# EAGLE board RangkaianESP32_&_RangkaianDriverMotorDC (EAGLE 9.6.2)
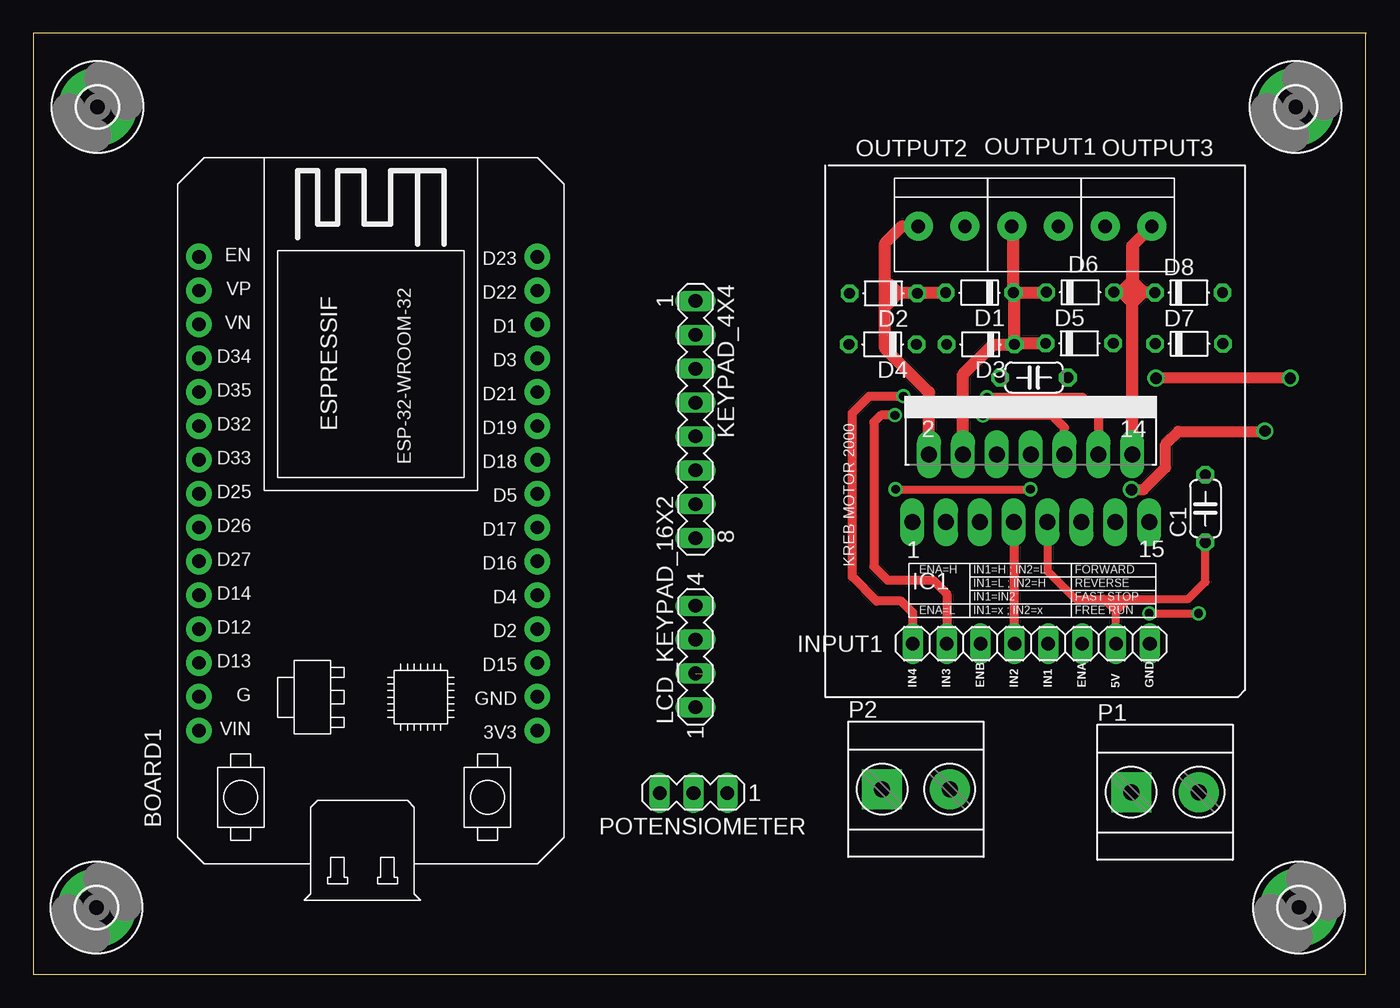
[diagram p0: board, top side]
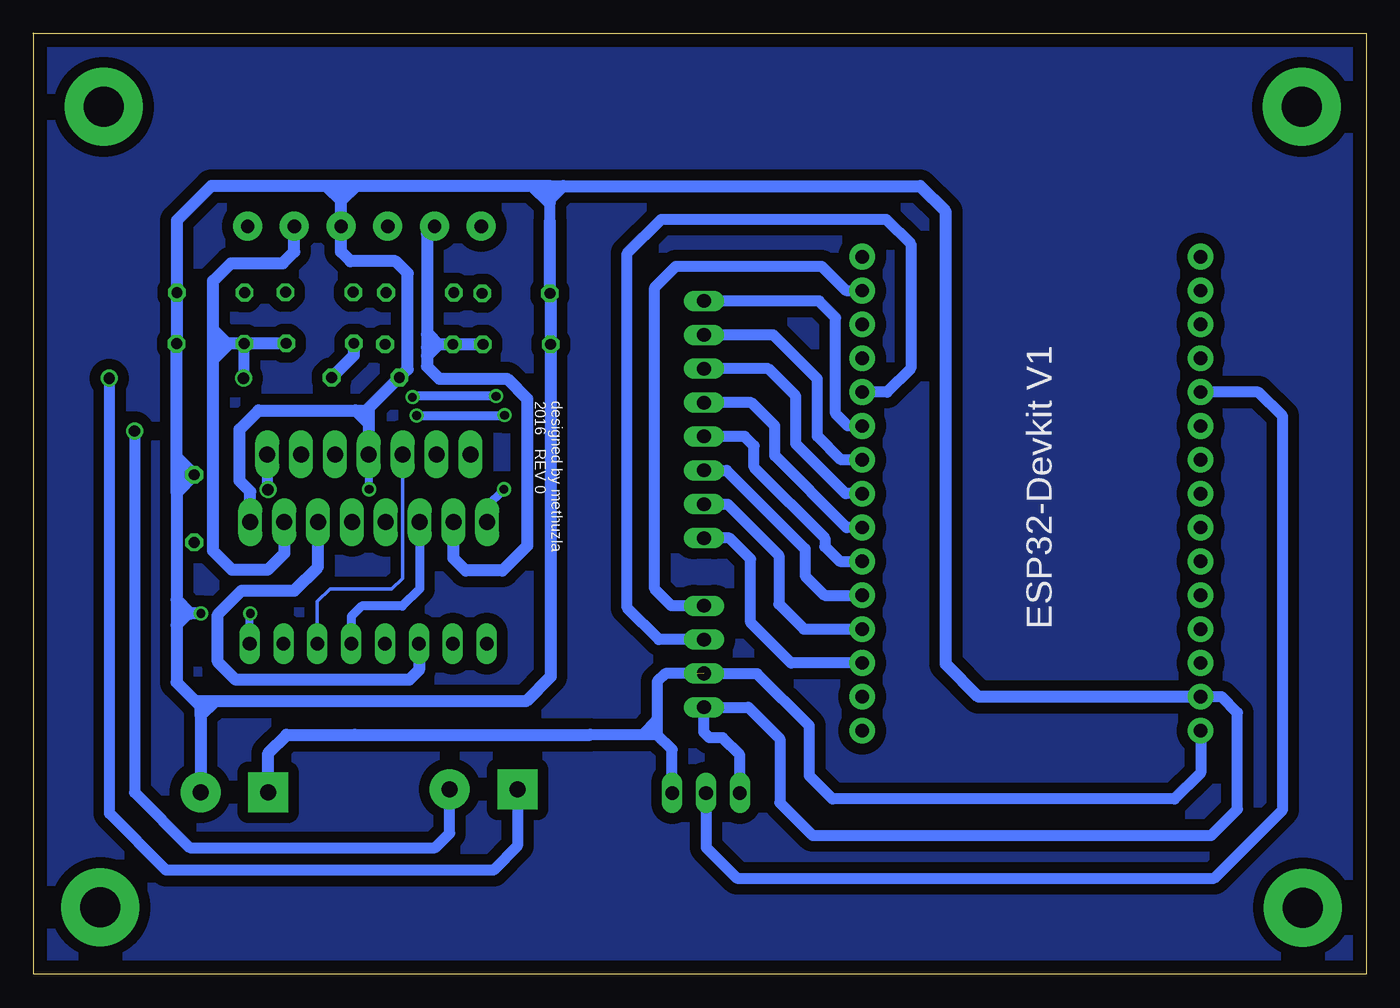
[diagram p1: board, bottom side, seen from below]

Size 100 x 70.61 mm. Coordinates in mm from the lower left corner, seen from the top.
Outline: 99.97,0 99.97,0
Outline: 99.97,0 99.97,70.09
Outline: 99.97,0 0,0 0,70.61 100,70.61 99.97,70.59 99.97,0
Copper layers (1*16): Top 0.035mm / dielectric 1.5mm / Bottom 0.035mm
Design rules "default": minimum track width 6mil, minimum drill 0.35mm, track to track 6mil, track to pad 6mil, pad to pad 6mil, via to via 6mil, smd to smd 6mil, copper to edge 40mil, drill to drill 6mil, minimum pad ring 10mil, minimum via ring 8mil, stop-mask expansion 4mil, vias tented up to drill 0mil, thermal gap 10mil
Holes 2.8 mm at 64.74,109.98 91.16,109.98 91.16,145.29 64.74,145.29

## Footprints (pad centres in the part's own frame; a part is rotated, then mirrored left to right if it is on the bottom)
ESP32-DEVKITV1 = drill 1 pad 1.93: 3V3 0,0; D1 30.48,0; D2 7.62,0; D3 27.94,0; D4 10.16,0; D5 17.78,0; D12 7.62,25.4; D13 5.08,25.4; D14 10.16,25.4; D15 5.08,0; D16 12.7,0; D17 15.24,0; D18 20.32,0; D19 22.86,0; D21 25.4,0; D22 33.02,0; D23 35.56,0; D25 17.78,25.4; D26 15.24,25.4; D27 12.7,25.4; D32 22.86,25.4; D33 20.32,25.4; D34 27.94,25.4; D35 25.4,25.4; EN 35.56,25.4; GND 2.54,25.4; GND@1 2.54,0; VIN 0,25.4; VN 30.48,25.4; VP 33.02,25.4
C050-024X044 = drill 0.813 octagon: 1 -2.54,0; 2 2.54,0
D-5 = drill 0.813 octagon: A 2.54,0; C -2.54,0
3,0-PAD = drill 3 pad 5.842: B3,0 0,0
MULTIWATT-15 = drill 1.2 long: 1 -8.89,-7.62; 2 -7.62,-2.54; 3 -6.35,-7.62; 4 -5.08,-2.54; 5 -3.81,-7.62; 6 -2.54,-2.54; 7 -1.27,-7.62; 8 0,-2.54; 9 1.27,-7.62; 10 2.54,-2.54; 11 3.81,-7.62; 12 5.08,-2.54; 13 6.35,-7.62; 14 7.62,-2.54; 15 8.89,-7.62
1X08 = drill 1.016 long: 1 -8.89,0; 2 -6.35,0; 3 -3.81,0; 4 -1.27,0; 5 1.27,0; 6 3.81,0; 7 6.35,0; 8 8.89,0
MA08-1 = drill 1.016 long: 1 -8.89,0; 2 -6.35,0; 3 -3.81,0; 4 -1.27,0; 5 1.27,0; 6 3.81,0; 7 6.35,0; 8 8.89,0
MA04-1 = drill 1.016 long: 1 -3.81,0; 2 -1.27,0; 3 1.27,0; 4 3.81,0
1X2-3.5MM = drill 1 pad 2.184: 1 1.8,0; 2 -1.7,0
TERMINAL_2P = drill 1.2 pad 3 square: 1 -2.54,0 | drill 1.2 pad 3: 2 2.54,0
MA03-1 = drill 1.016 long: 1 -2.54,0; 2 0,0; 3 2.54,0

## Placement (x,y rotation side)
BOARD1  ESP32DEVKITV1SHRIDATTDUDHAT  [ESP32-DEVKITV1]  37.82,18.29 90 top
C1  100nF  [C050-024X044]  87.93,34.95 90 top
C2  100nF  [C050-024X044]  75.08,44.78 180 top
D1  [D-5]  70.99,51.16 180 top
D2  [D-5]  63.78,51.1 180 top
D3  [D-5]  71.07,47.27 180 top
D4  [D-5]  63.73,47.27 180 top
D5  [D-5]  78.49,47.35 0 top
D6  [D-5]  78.54,51.18 0 top
D7  [D-5]  86.72,47.32 0 top
D8  [D-5]  86.69,51.16 0 top
H1  SPACER  [3,0-PAD]  94.97,5.03 0 top
H2  SPACER  [3,0-PAD]  4.75,5 0 top
H3  SPACER  [3,0-PAD]  4.83,65.1 0 top
H4  SPACER  [3,0-PAD]  94.72,65.1 0 top
IC1  L298  [MULTIWATT-15]  74.83,41.55 0 top
INPUT1  [1X08]  74.88,24.82 180 top
KEYPAD_4X4  [MA08-1]  49.68,41.63 270 top
LCD_KEYPAD_16X2  [MA04-1]  49.68,23.85 90 top
OUTPUT1  1X2-3.5MM  [1X2-3.5MM]  75.21,56.13 180 top
OUTPUT2  1X2-3.5MM  [1X2-3.5MM]  68.2,56.13 180 top
OUTPUT3  1X2-3.5MM  [1X2-3.5MM]  82.22,56.13 180 top
P1  SUMBER 5V DC  [TERMINAL_2P]  84.91,13.67 0 top
P2  Motor DC  [TERMINAL_2P]  66.22,13.89 0 top
POTENSIOMETER  [MA03-1]  49.53,13.61 180 top

## Library data of the parts
BOARD1 = ESP32-DEVKITV1
C1 C2 = rcl
D1-D8 = diode
H1-H4 = LIBRARY LKS BARU
IC1 = st-microelectronics; MPN: L298N; OC_FARNELL: 1589425; OC_NEWARK: 32M1527
INPUT1 = pinhead
KEYPAD_4X4 LCD_KEYPAD_16X2 POTENSIOMETER = con-lstb; OC_FARNELL: unknown; OC_NEWARK: unknown
OUTPUT1-OUTPUT3 = adafruit
P1 P2 = 00-lksprov2021-A1

## Nets
+5V: C1.1 IC1.9 INPUT1.2
C1: BOARD1.D16 KEYPAD_4X4.5
C2: BOARD1.D4 KEYPAD_4X4.6
C3: BOARD1.D2 KEYPAD_4X4.7
C4: BOARD1.D15 KEYPAD_4X4.8
GND: BOARD1.GND C1.2 C2.2 D2.A D4.A D7.A D8.A IC1.1 IC1.8 IC1.15 INPUT1.1 LCD_KEYPAD_16X2.1 OUTPUT1.2 P1.2 POTENSIOMETER.3
N$1: D1.A D2.C IC1.2 OUTPUT2.1
N$2: D3.A D4.C IC1.3 OUTPUT2.2
N$3: D6.A D8.C IC1.14 OUTPUT3.2 P2.2
N$4: D5.A D7.C IC1.13 OUTPUT3.1 P2.1
N$5: IC1.5 INPUT1.4
N$6: IC1.7 INPUT1.5
N$7: IC1.6 INPUT1.3
N$8: IC1.11 INPUT1.6
N$9: IC1.10 INPUT1.7
N$10: IC1.12 INPUT1.8
N$11: BOARD1.D35 POTENSIOMETER.2
R1: BOARD1.D19 KEYPAD_4X4.1
R2: BOARD1.D18 KEYPAD_4X4.2
R3: BOARD1.D5 KEYPAD_4X4.3
R4: BOARD1.D17 KEYPAD_4X4.4
SCL: BOARD1.D22 LCD_KEYPAD_16X2.4
SDA: BOARD1.D21 LCD_KEYPAD_16X2.3
V+: C2.1 D1.C D3.C D5.C D6.C IC1.4 OUTPUT1.1
VCC: BOARD1.VIN LCD_KEYPAD_16X2.2 P1.1 POTENSIOMETER.1

## Tracks (layer width: path | path; a pad name or v marks a point on that pad's centre or on a via)
+5V
  Top 0.61: IC1.9 76.1,30.25 78.18,28.17 80.31,28.17 | C1.1 87.93,29.44 86.66,28.17 82.22,28.17 82.14,28.17 | 80.31,28.17 81.28,28.17 | 81.28,28.17 82.14,28.17 | INPUT1.2 81.23,27.25 | 81.23,27.25 81.23,28.12 81.28,28.17 | 80.31,28.17 81.23,27.25 | 81.23,27.25 82.14,28.17
A
  pour Bottom (isolate 0.813): 0.1,70.18 99.72,70.18 99.97,69.93 99.97,0.36 0.2,0.36 0.08,0.23 0.08,70.08 -0.03,70.18
C1
  Bottom 0.813: KEYPAD_4X4.5 46.63,40.36 45.92,39.65 45.92,38.05 40.61,32.74 40.61,32.11 39.5,30.99 BOARD1.D16
C2
  Bottom 0.813: 38.51,28.45 BOARD1.D4 40.64,28.45 42.09,29.9 42.09,31.93 47.98,37.82 KEYPAD_4X4.6
C3
  Bottom 0.813: KEYPAD_4X4.7 47.9,35.28 44.07,31.44 44.07,27.79 42.19,25.91 BOARD1.D2
C4
  Bottom 0.813: BOARD1.D15 43.15,23.37 46.18,26.39 46.18,31.17 47.75,32.74 KEYPAD_4X4.8
GND  (via drill 0.65)
  Top 0.61: v64.69,36.4 v74.8,36.4 | v83.72,27.08 v87.43,27.08
  Bottom 0.61: IC1.1 65.94,35.15 v64.69,36.4 | v74.8,36.4 74.8,38.99 IC1.8 | INPUT1.1 83.77,27.03 v83.72,27.08
  Bottom 0.813: BOARD1.GND 10.85,20.83 9.65,19.63 9.65,12.39 11.63,10.41 41.53,10.41 43.99,12.88 43.99,17.68 46.35,20.04 LCD_KEYPAD_16X2.1 49.68,18.16 49.28,17.75 48.29,17.75 46.99,16.46 POTENSIOMETER.3 | 61.24,56.49 61.24,57.76 61.24,57.78 | 61.24,58.14 61.24,59.13 61.26,59.16 | 60.22,59.16 61.24,58.14 | 61.24,58.14 61.24,57.78 | 61.24,57.78 62.61,59.16
  Bottom 0.889: 74.83,42.32 74.83,42.49 C2.2 71.91,45.41 71.91,52.6 72.82,53.52 76.2,53.52 76.91,54.23 OUTPUT1.2 76.91,58.04 | 74.83,42.32 74.83,41.33 | 74.83,41.33 IC1.8 | 61.24,56.49 D2.A 61.19,51.05 D4.A 61.19,22.35 63.04,20.5 86.41,20.5 | 75.79,59.16 62.61,59.16 61.26,59.16 60.22,59.16 33.48,59.16 31.55,57.23 31.55,23.29 29.08,20.83 BOARD1.GND | 75.79,59.16 77.09,59.16 | 77.09,59.16 77.95,59.16 | 77.95,59.16 86.64,59.16 89.23,56.57 D8.A 89.26,51.13 D7.A 89.26,38.81 | C1.2 89.26,38.81 | 76.91,58.04 76.91,58.98 77.09,59.16 | 75.79,59.16 76.91,58.04 | 76.91,58.04 77.95,59.08 77.95,59.16 | 89.26,36.17 89.26,28.12 | 89.26,36.17 89.26,37.54 | 89.26,37.54 89.26,38.81 | 89.26,28.12 88.21,27.08 v87.43,27.08 88.39,27.08 89.26,26.21 | C1.2 89.26,36.17 | 89.26,37.54 89.2,37.49 C1.2 | IC1.15 83.72,36.22 84.53,37.03 84.53,40.89 83.11,42.32 75.82,42.32 | 75.82,42.32 74.83,42.32 | 74.83,41.33 75.82,42.32 | 89.26,28.12 89.26,26.21 | 89.26,26.21 89.26,21.92 87.83,20.5 | 87.45,19.46 P1.2 | 86.41,20.5 87.83,20.5 | 87.45,19.46 87.45,20.12 87.83,20.5 | 87.45,19.46 86.41,20.5
N$1
  Top 0.889: IC1.2 67.21,43.66 63.91,46.96 63.91,50.29 | OUTPUT2.1 65.18,56.13 63.91,54.86 63.91,51.79 | 63.91,50.29 63.91,51.1 | 63.91,51.1 63.91,51.79 | D1.A 66.37,51.16 D2.C 64.92,51.1 | 64.92,51.1 63.91,51.1 | 64.92,51.1 64.11,50.29 63.91,50.29 | 64.92,51.1 64.24,51.79 63.91,51.79
N$2
  Bottom 0.889: OUTPUT2.2 70.46,55.57 70.46,48.03 | IC1.3 68.48,31.22 67.56,30.3 64.8,30.3 62.94,32.16 62.94,43.18 64.47,44.7 69.55,44.7 70.46,45.62 70.46,46.41 | 70.46,48.03 70.46,47.07 | 70.46,47.07 70.46,46.41 | D4.C D3.A 69.6,47.27 | 69.6,47.27 70.26,47.27 70.46,47.07 | 70.46,46.41 69.6,47.27 | 69.6,47.27 70.36,48.03 70.46,48.03
N$3  (via drill 0.85)
  Top 0.813: v82.4,36.37 83.29,36.37 84.94,38.02 84.94,39.78 85.9,40.74 92.38,40.74 v92.41,40.77
  Top 0.889: IC1.14 82.45,50.37 | 82.45,50.37 82.45,52.04 | 82.45,52.04 82.45,54.66 82.52,54.74 | D8.C 83.31,51.16 | 83.24,51.16 82.52,51.16 | 82.52,51.16 81.56,51.16 | 81.56,51.16 81.1,51.16 D6.A 81.64,51.18 82.45,50.37 | 82.52,51.16 82.52,51.94 | 82.52,51.94 82.52,54.74 | 82.52,54.74 OUTPUT3.2 | 82.45,52.04 81.56,51.16 | 82.45,50.37 83.24,51.16 | 83.24,51.16 83.31,51.16 | 83.31,51.16 82.52,51.94
  Bottom 0.813: IC1.14 82.45,36.42 v82.4,36.37 | v92.41,40.77 92.41,13.64 88.26,9.5 69.85,9.5 68.76,10.59 P2.2
N$4  (via drill 0.85)
  Top 0.813: v94.31,44.73 v84.23,44.73
  Bottom 0.813: P2.1 63.68,9.63 65.48,7.82 90.04,7.82 94.28,12.06 94.28,44.7 v94.31,44.73 | v84.23,44.73 84.18,44.78 D7.C
  Bottom 0.889: IC1.13 81.18,31.6 82.42,30.35 85.09,30.35 86.51,31.77 86.51,46.15 | OUTPUT3.1 80.42,54.23 81.28,53.36 85.17,53.36 86.51,52.02 86.51,48.39 | 86.51,46.15 86.51,48.39 | D5.A 84.15,47.35 D7.C 85.32,47.32 | 85.45,47.32 85.85,47.32 85.95,47.22 | 85.45,47.32 85.32,47.32 | 85.45,47.32 86.51,48.39 | 85.32,47.32 86.49,46.15 86.51,46.15
N$5
  Bottom 0.66: IC1.5 71.02,28.93 72.31,27.63 75.36,27.63 76.15,26.85 INPUT1.4
N$6
  Top 0.66: IC1.7 73.56,24.87 INPUT1.5
N$7
  Bottom 0.254: INPUT1.3 78.69,27.96 77.75,28.9 73.1,28.9 72.29,29.72 IC1.6
N$8
  Bottom 0.889: INPUT1.6 71.07,22.83 71.81,22.1 84.81,22.1 86.16,23.44 86.16,27 84.35,28.8 80.42,28.8 78.64,30.58 IC1.11
N$9  (via drill 0.65)
  Top 0.66: IC1.10 77.37,41.02 76.45,41.93 v71.25,41.93 | v64.64,41.96 63.6,41.96 63.07,41.43 63.07,30.61 64.08,29.59 67.49,29.59 68.53,28.55 INPUT1.7
  Bottom 0.66: v71.25,41.93 64.67,41.93 v64.64,41.96
N$10  (via drill 0.65)
  Top 0.66: INPUT1.8 65.99,27.13 65.1,28.02 63.27,28.02 61.44,29.84 61.44,42.11 62.71,43.38 v65.28,43.38 | v71.55,43.31 78.71,43.31 79.91,42.11 IC1.12
  Bottom 0.66: v65.28,43.38 71.48,43.38 v71.55,43.31
N$11
  Bottom 0.813: BOARD1.D35 8.08,43.69 6.27,41.88 6.27,12.34 11.4,7.21 47.22,7.21 49.53,9.52 POTENSIOMETER.2
R1
  Bottom 0.813: BOARD1.D19 38.89,41.15 39.8,42.06 39.8,49.28 41.05,50.52 KEYPAD_4X4.1
R2
  Bottom 0.813: BOARD1.D18 39.4,38.61 41.17,40.39 41.17,44.68 44.48,47.98 KEYPAD_4X4.2
R3
  Bottom 0.813: BOARD1.D5 39.07,36.07 42.8,39.8 42.8,43.38 44.86,45.44 KEYPAD_4X4.3
R4
  Bottom 0.813: BOARD1.D17 38.99,33.53 44.37,38.91 44.37,41.15 46.13,42.9 KEYPAD_4X4.4
SCL
  Bottom 0.813: LCD_KEYPAD_16X2.4 52.12,27.66 53.39,28.93 53.39,51.54 51.79,53.14 40.87,53.14 39.04,51.31 BOARD1.D22
SDA
  Bottom 0.813: LCD_KEYPAD_16X2.3 53.06,25.12 55.45,27.51 55.45,54.1 52.88,56.67 36.02,56.67 34.16,54.81 34.16,45.47 35.94,43.69 BOARD1.D21
V+
  Top 0.889: IC1.4 69.75,45.03 71.98,47.27 D3.C | D5.C 73.69,47.35 D3.C | D3.C 73.61,51.08 D1.C | D1.C 73.53,56.01 OUTPUT1.1 | D1.C 75.97,51.16 D6.C
  Bottom 0.889: C2.1 75.95,46.46 D5.C
VCC  (1 unrouted)
  Bottom 0.813: 50.22,22.55 45.69,22.55 41.78,18.64 41.78,14.91 40.03,13.16 14.38,13.16 12.42,15.11 BOARD1.VIN | 75.49,17.98 75.87,17.98 | POTENSIOMETER.1 52.07,16.87 53.19,17.98 | 53.19,17.98 54.31,17.98 | 54.31,17.98 58.22,17.98 | LCD_KEYPAD_16X2.2 52.58,22.58 53.19,21.97 53.19,19.28 53.19,19.1 | 53.19,19.1 53.19,17.98 | 54.31,17.98 53.19,19.1
  Bottom 0.889: P1.1 82.37,16.61 81,17.98 75.87,17.98 58.22,17.98

## Text on the board
tPlace: KREB MOTOR 2000 | ENA=H | IN1=H ; IN2=L | FORWARD | IN1=L ; IN2=H | REVERSE | IN1=IN2 | FAST STOP | ENA=L | IN1=x ; IN2=x | FREE RUN | IN4 | IN3 | ENB | IN2 | IN1 | ENA | 5V | GND
bPlace: designed by methuzla / 2016 REV 0